# EAGLE board stmdc (EAGLE 7.2.0)
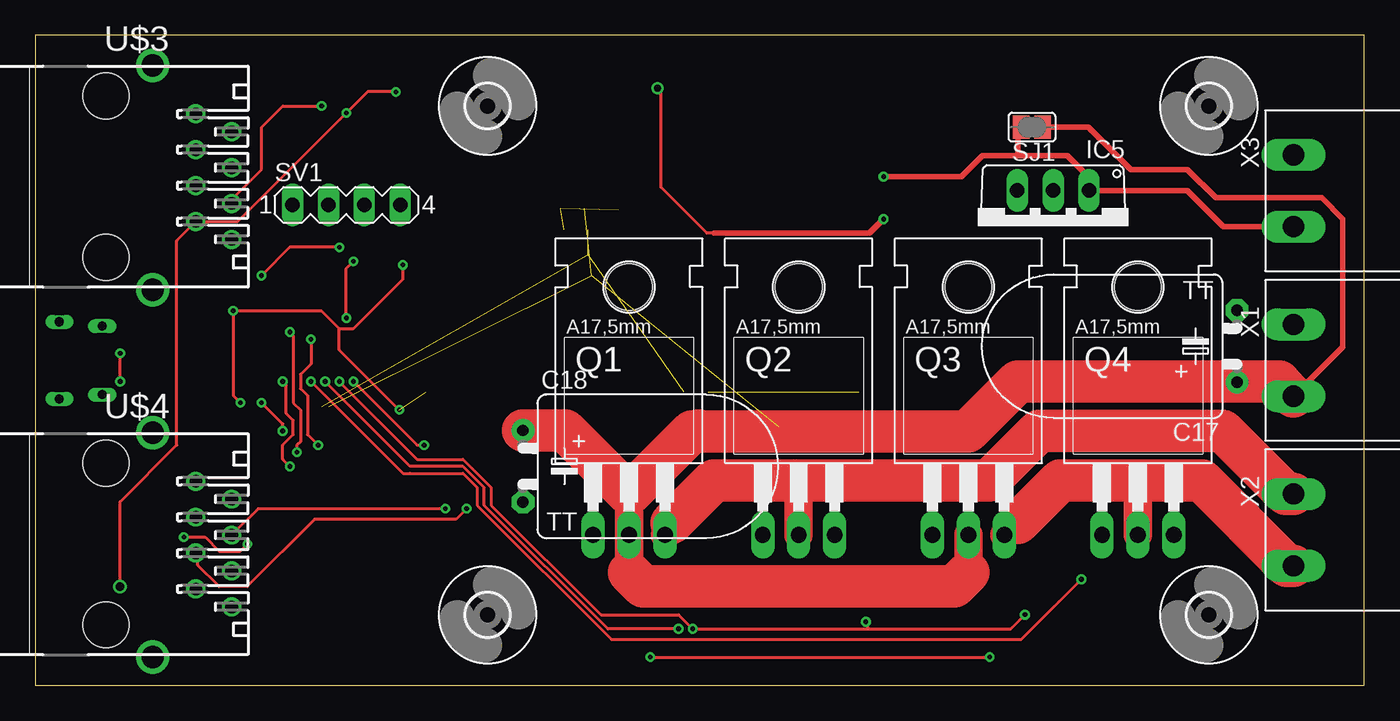
[diagram p0: board, top side]
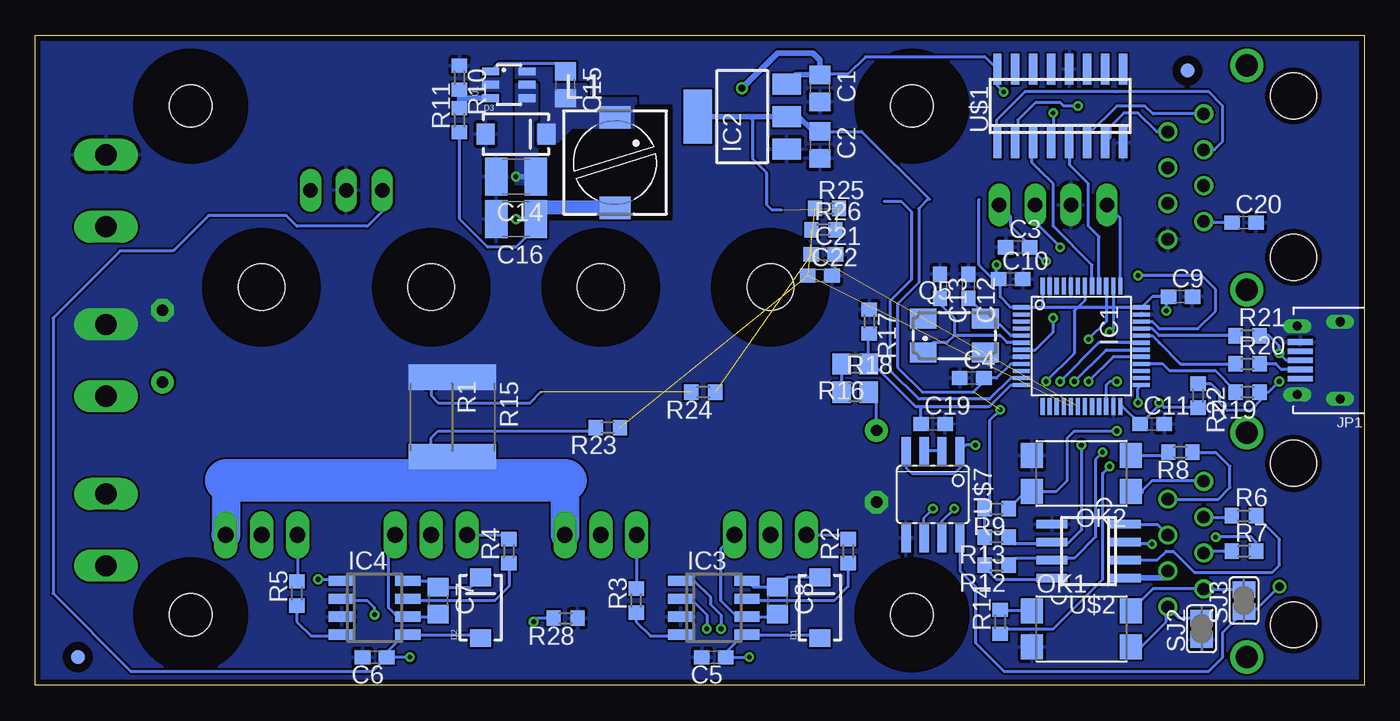
[diagram p1: board, bottom side, seen from below]

Size 94 x 46 mm. Coordinates in mm from the lower left corner, seen from the top.
Outline: 0,0 94,0 94,46 0,46 0,0
Copper layers (1*16): Top 0.0356mm / dielectric 1.5011mm / Bottom 0.0356mm
Design rules "osh *": minimum track width 6mil, minimum drill 13mil, track to track 6mil, track to pad 6mil, pad to pad 6mil, via to via 6mil, smd to smd 6mil, copper to edge 15mil, drill to drill 6mil, minimum pad ring 7mil, minimum via ring 7mil, stop-mask expansion 3mil, vias tented up to drill 0mil, thermal gap 10mil
bRestrict: area 49,33 to 58,41

## Footprints (pad centres in the part's own frame; a part is rotated, then mirrored left to right if it is on the bottom)
C0805 = smd 1.3 x 1.5: 1 -0.95,0; 2 0.95,0
C0603 = smd 1.1 x 1: 1 -0.85,0; 2 0.85,0
C1210 = smd 1.6 x 2.7: 1 -1.4,0; 2 1.4,0
TT5D11L = drill 0.813 pad 1.6: + -2.54,0 | drill 0.813 pad 1.6 octagon: - 2.54,0
SMA-DIODE = smd 1.27 x 1.47: A -2.15,0; C 2.15,0
3,0 = hole 3: 0,0
LQFP48 = smd 0.3 x 1.2: 1 -2.75,-4.25; 2 -2.25,-4.25; 3 -1.75,-4.25; 4 -1.25,-4.25; 5 -0.75,-4.25; 6 -0.25,-4.25; 7 0.25,-4.25; 8 0.75,-4.25; 9 1.25,-4.25; 10 1.75,-4.25; 11 2.25,-4.25; 12 2.75,-4.25; 25 2.75,4.25; 26 2.25,4.25; 27 1.75,4.25; 28 1.25,4.25; 29 0.75,4.25; 30 0.25,4.25; 31 -0.25,4.25; 32 -0.75,4.25; 33 -1.25,4.25; 34 -1.75,4.25; 35 -2.25,4.25; 36 -2.75,4.25 | smd 1.2 x 0.3: 13 4.25,-2.75; 14 4.25,-2.25; 15 4.25,-1.75; 16 4.25,-1.25; 17 4.25,-0.75; 18 4.25,-0.25; 19 4.25,0.25; 20 4.25,0.75; 21 4.25,1.25; 22 4.25,1.75; 23 4.25,2.25; 24 4.25,2.75; 37 -4.25,2.75; 38 -4.25,2.25; 39 -4.25,1.75; 40 -4.25,1.25; 41 -4.25,0.75; 42 -4.25,0.25; 43 -4.25,-0.25; 44 -4.25,-0.75; 45 -4.25,-1.25; 46 -4.25,-1.75; 47 -4.25,-2.25; 48 -4.25,-2.75
SOT223 = smd 1.5 x 2: 1 -2.3,-3.15; 2 0,-3.15; 3 2.3,-3.15 | smd 3.8 x 2: 4 0,3.15
SO08 = smd 0.72 x 1.78: 1 -1.905,-2.35; 2 -0.635,-2.35; 3 0.635,-2.35; 4 1.905,-2.35; 5 1.905,2.35; 6 0.635,2.35; 7 -0.635,2.35; 8 -1.905,2.35
TO220V = drill 1.016 long: 1 -2.54,-2.54; 2 0,-2.54; 3 2.54,-2.54
FCI-10103594-0001LF = smd 0.4 x 1.75: 1 -1.3,4.525; 2 -0.65,4.525; 3 0,4.525; 4 0.65,4.525; 5 1.3,4.525 | drill 0.65 pad 1 long: 6 2.425,4.73; 7 2.725,1.7; 8 -2.725,1.7; 9 -2.425,4.73
PIS2816 = smd 2.2 x 1.6: 1 0,3.2; 2 0,-3.2
SMD4 = smd 1.78 x 1.55: 1 -1.27,-3.5; 2 1.27,-3.5; 3 1.27,3.5; 4 -1.27,3.5
TO220BH = drill 1.118 long: D 0,-6.35; G -2.54,-6.35; S 2.54,-6.35 | hole 3.302: 0,11.176
CTS406 = smd 1.9 x 1.4: 1 -2.2,-1.2; 2 2.2,-1.2; 3 2.2,1.2; 4 -2.2,1.2
R2512 = smd 1.8 x 3.2: 1 -2.8,0; 2 2.8,0 | smd 1.27 x 0.635: P$1 -2.54,0; P$2 2.54,0
R0603 = smd 1 x 1.1: 1 -0.85,0; 2 0.85,0
R2512' = smd 1.8 x 3.2: 1 -2.8,0; 2 2.8,0
R0805 = smd 1.3 x 1.5: 1 -0.95,0; 2 0.95,0
SJ = smd 1.168 x 1.6: 1 -0.762,0; 2 0.762,0
MA04-1 = drill 1.016 long: 1 -3.81,0; 2 -1.27,0; 3 1.27,0; 4 3.81,0
SOT23-6 = smd 0.55 x 1.2: 1 0.95,1.3; 2 0,1.3; 3 -0.95,1.3; 4 -0.95,-1.3; 5 0,-1.3; 6 0.95,-1.3
SO16 = smd 0.6 x 2.2: 1 -4.445,-2.6; 2 -3.175,-2.6; 3 -1.905,-2.6; 4 -0.635,-2.6; 5 0.635,-2.6; 6 1.905,-2.6; 7 3.175,-2.6; 8 4.445,-2.6; 9 4.445,2.6; 10 3.175,2.6; 11 1.905,2.6; 12 0.635,2.6; 13 -0.635,2.6; 14 -1.905,2.6; 15 -3.175,2.6; 16 -4.445,2.6
SO08' = smd 0.6 x 2.2: 1 -1.905,-2.6; 2 -0.635,-2.6; 3 0.635,-2.6; 4 1.905,-2.6; 5 1.905,2.6; 6 0.635,2.6; 7 -0.635,2.6; 8 -1.905,2.6
RJ45 = drill 0.889: 1 -4.445,6.35; 2 -3.175,8.89; 3 -1.905,6.35; 4 -0.635,8.89; 5 0.635,6.35; 6 1.905,8.89; 7 3.175,6.35; 8 4.445,8.89 | drill 1.575 pad 2.184: G3 -7.874,3.302; G4 8.001,3.302 | hole 3.251: -5.715,0; 5.715,0
FIDUCIAL_1MM = smd 1 x 1: 1 0,0
SOIC08 = smd 0.66 x 2.032: 1 -1.905,-3.073; 2 -0.635,-3.073; 3 0.635,-3.073; 4 1.905,-3.073; 5 1.905,3.073; 6 0.635,3.073; 7 -0.635,3.073; 8 -1.905,3.073
AKL230-02 = drill 1.5 long: 1 -2.54,0; 2 2.54,0

## Placement (x,y rotation side)
C1  [C0805]  38.5,42.25 270 bottom
C2  [C0805]  38.5,38.25 270 bottom
C3  [C0603]  24.5,31 0 bottom
C4  [C0603]  27.75,21.75 0 bottom
C5  [C0603]  46,2 180 bottom
C6  [C0603]  70,2 180 bottom
C7  [C0805]  65.5,6 270 bottom
C8  [C0805]  41.5,6 270 bottom
C9  [C0603]  13,27.5 0 bottom
C10  [C0603]  25,28.75 0 bottom
C11  [C0603]  15,18.5 0 bottom
C12  [C0603]  28,28.25 270 bottom
C13  [C0603]  30,28.25 270 bottom
C14  [C1210]  60,36 180 bottom
C15  [C0805]  56.5,42.5 270 bottom
C16  [C1210]  60,33 180 bottom
C17  [TT5D11L]  85,24 90 top
C18  [TT5D11L]  34.5,15.5 270 top
C19  [C0603]  30.5,18.5 0 bottom
C20  [C0603]  8.5,32.75 0 bottom
C21  1n  [C0603]  38.25,30.5 0 bottom
C22  1n  [C0603]  38.5,29 0 bottom
D1  [SMA-DIODE]  38.5,5.5 90 bottom
D2  [SMA-DIODE]  62.5,5.5 90 bottom
D3  [SMA-DIODE]  60,39 0 bottom
H1  MOUNT-HOLE3.0  [3,0]  83,5 0 top
H2  MOUNT-HOLE3.0  [3,0]  83,41 0 top
H3  MOUNT-HOLE3.0  [3,0]  32,41 0 top
H4  MOUNT-HOLE3.0  [3,0]  32,5 0 top
IC1  STM32F303CBT  [LQFP48]  20,24 270 bottom
IC2  LD117AS33TR  [SOT223]  44,40.25 90 bottom
IC3  IR2184S  [SO08]  46,5.5 270 bottom
IC4  IR2184S  [SO08]  70,5.5 270 bottom
IC5  7815TV  [TO220V]  72,32.5 180 top
JP1  USB-RECEPTABLE  [FCI-10103594-0001LF]  0,23 90 bottom
L1  [PIS2816]  53,37 0 bottom
OK1  LTV816S  [SMD4]  20,4 270 bottom
OK2  LTV816S  [SMD4]  20,15 90 bottom
Q1  [TO220BH]  42,17 0 top
Q2  [TO220BH]  54,17 0 top
Q3  [TO220BH]  66,17 0 top
Q4  [TO220BH]  78,17 0 top
Q5  [CTS406]  29,24.75 0 bottom
R1  0.01  [R2512]  66,19 270 bottom
R2  [R0603]  36.5,9.5 90 bottom
R3  [R0603]  51.5,6 90 bottom
R4  [R0603]  60.5,9.5 90 bottom
R5  [R0603]  75.5,6.5 90 bottom
R6  [R0603]  8.5,12 0 bottom
R7  [R0603]  8.5,9.5 0 bottom
R8  [R0603]  13,16.5 180 bottom
R9  [R0603]  26,12.5 180 bottom
R10  [R0603]  64,43 270 bottom
R11  [R0603]  64,40 90 bottom
R12  [R0603]  26,8.5 180 bottom
R13  [R0603]  26,10.5 180 bottom
R14  [R0603]  25.75,4.5 90 bottom
R15  0.01  [R2512']  63,19 270 bottom
R16  [R0805]  36,22.75 180 bottom
R17  [R0603]  35,25.75 270 bottom
R18  [R0805]  36,20.75 0 bottom
R19  [R0603]  8.25,20.75 180 bottom
R20  [R0603]  8.25,22.75 0 bottom
R21  [R0603]  8.25,24.75 0 bottom
R22  [R0603]  11.75,20.5 270 bottom
R23  1k  [R0603]  53.5,18.25 180 bottom
R24  1k  [R0603]  46.75,20.75 180 bottom
R25  15k  [R0603]  38,33.75 0 bottom
R26  15k  [R0603]  38.25,32.25 0 bottom
R28  [R0603]  56.5,4.75 180 bottom
SJ1  [SJ]  70.5,39.5 180 top
SJ2  [SJ]  11.5,4 90 bottom
SJ3  [SJ]  8.5,6 90 bottom
SV1  [MA04-1]  22,34 0 top
U1  LMR14206  [SOT23-6]  60.5,42.5 90 bottom
U$1  AM26LS32ACD  [SO16]  21.5,41 0 bottom
U$2  HCPL-053L-SMD  [SO08']  19.5,9.5 90 bottom
U$3  RJ45S  [RJ45]  5,36 270 top
U$4  RJ45S  [RJ45]  5,10 270 top
U$5  FIDUCIAL  [FIDUCIAL_1MM]  91,2 0 bottom
U$6  FIDUCIAL  [FIDUCIAL_1MM]  12.5,43.5 0 bottom
U$7  ADM485SOIC8  [SOIC08]  30.5,13.5 180 bottom
X1  [AKL230-02]  89,23 270 top
X2  [AKL230-02]  89,11 270 top
X3  [AKL230-02]  89,35 270 top

## Library data of the parts
C1-C22 L1 R2-R26 R28 = rcl
D1-D3 = SparkFun-DiscreteSemi
H1-H4 = holes
IC1 = micro-stm_v2
IC2 = v-reg
IC3 IC4 = IR2184; MF: INTERNATIONAL RECTIFIER(IR); MPN: IR2184
IC5 = linear
JP1 R1 U1 U$1-U$4 U$7 = reroolib
OK1 OK2 = optocoupler; OC_FARNELL: unknown; OC_NEWARK: unknown
Q1-Q4 = transistor-power
Q5 = crystal; OC_FARNELL: unknown; OC_NEWARK: unknown
SJ1-SJ3 = jumper
SV1 = con-lstb; OC_FARNELL: unknown; OC_NEWARK: unknown
U$5 U$6 = adafruit
X1-X3 = reroolib; OC_FARNELL: unknown; OC_NEWARK: unknown

## Nets
3V3: C2.1 C4.2 C9.1 C10.1 C11.1 IC1.1 IC1.9 IC1.24 IC1.36 IC1.48 IC2.4 R9.2 R12.2 R13.2 R22.2 R25.2 R26.2 U$2.8
5V: C1.1 C16.1 C20.1 IC2.3 L1.2 R11.1 SJ3.1 U$1.4 U$1.16 U$3.7 U$7.8
24V: C14.1 IC5.1 SJ1.2 U1.4 U1.5 X3.2
A+: U$1.6 U$3.1
A-: U$1.7 U$3.2
B+: U$1.2 U$3.6
B-: U$1.1 U$3.3
CUR: IC1.11
DC_SENSE: C19.1 IC1.12 R16.1 R17.2
DIR+: U$2.4 U$4.4 U$7.7
DIR-: R7.1 U$4.5 U$7.6
EN+: OK2.1 U$4.1
EN-: R8.1 U$4.2
ERR+: OK1.4 SJ3.2 U$4.7
ERR-: OK1.3 SJ2.2 U$4.8
GND: C1.2 C2.2 C3.1 C4.1 C5.2 C6.2 C9.2 C10.2 C11.2 C12.1 C13.1 C14.2 C16.2 C17.- C18.- C19.2 C20.2 C21.2 C22.2 D3.A IC1.8 IC1.23 IC1.35 IC1.44 IC1.47 IC2.1 IC3.3 IC4.3 IC5.2 JP1.5 JP1.6 JP1.7 JP1.8 JP1.9 OK1.2 OK2.3 R1.1 R10.1 R15.1 R17.1 R28.1 SJ2.1 SV1.2 U1.2 U$1.8 U$1.12 U$2.5 U$3.8 U$7.5 X1.1 X3.1
LIN: C15.2 D3.C L1.1 U1.6
N$1: C8.1 D1.C IC3.8
N$2: C8.2 IC3.6 Q1.S Q2.D X2.1
N$3: C5.1 C6.1 D1.A D2.A IC3.5 IC4.5 IC5.3
N$4: Q2.G R3.2
N$5: Q1.G R2.2
N$6: IC3.4 R3.1
N$7: IC3.7 R2.1
N$8: C7.2 IC4.6 Q3.S Q4.D X2.2
N$9: C7.1 D2.C IC4.8
N$10: IC4.7 R4.1
N$11: IC4.4 R5.1
N$12: Q3.G R4.2
N$13: C12.2 IC1.5 Q5.3
N$14: Q4.G R5.2
N$15: R16.2 R18.1
N$16: C17.+ C18.+ Q1.D Q3.D R18.2 SJ1.1 X1.2
N$17: U$7.2 U$7.3
N$18: C13.2 IC1.6 Q5.1
N$19: R6.2 U$2.2
N$20: R1.P$2 R23.2
N$21: R7.2 U$2.3
N$22: OK2.2 R8.2
N$23: C15.1 U1.1
N$24: R1.P$1 R24.2
N$27: R10.2 R11.2 U1.3
N$28: OK1.1 R14.2
N$29: JP1.3 R19.1 R21.2 R22.1
N$30: JP1.2 R20.2
N$33: IC1.19
N$37: IC1.16
N$38: IC1.15
N$39: IC1.14
N$40: IC1.13
N$43: IC1.10
NRST: C3.2 IC1.7 SV1.4
S+: C22.1 IC1.17 R23.1 R25.1
S-: C21.1 IC1.18 R24.1 R26.1
SCL: IC1.45
SDA: IC1.46
SHUNT: Q2.S Q4.S R1.2 R15.2
STATUS: IC1.22 R14.1
STEP+: U$2.1 U$4.6
STEP-: R6.1 U$4.3
SWCLK: IC1.37 SV1.1
SWDIO: IC1.34 SV1.3
TIM1_BKIN: IC1.25 OK2.4 R9.1
TIM1_CH1: IC1.29 IC4.1
TIM1_CH2: IC1.30 IC3.1
TIM1_CH3: IC1.31 IC3.2 IC4.2 R28.2
TIM2_CH1: IC1.38 R12.1 U$2.7
TIM2_CH2: IC1.39 R13.1 U$2.6
TIM3_CH1: IC1.40 U$1.5
TIM3_CH2: IC1.41 U$1.3
USART1_RX: IC1.43
USART1_TX: IC1.42 U$7.1 U$7.4
USB_DM: IC1.32 R20.1
USB_DP: IC1.33 R21.1
USB_EN: IC1.28 R19.2

## Tracks (layer width: path | path; a pad name or v marks a point on that pad's centre or on a via)
3V3  (via drill 0.33)  (3 unrouted)
  Top 0.2: v14.5,20 14,20.5 v14,26.5 20.25,26.5 21.5,25.25 | 21.5,25.25 22.5,25.25 26,28.75 v26,29.75 | v25.75,19.5 21.5,23.75 21.5,25.25
  Bottom 0.2: 22.75,26.75 IC1.36 15,27.5 C9.1 14,26.85 v14,26.5 | 22.75,26.75 IC1.1 25,26.75 25.75,27.5 25.75,28.65 C10.1 | 16.25,18.5 C11.1 | U$2.8 22.2,7.5 26,7.5 26.85,8.35 R12.2 R13.2 R9.2 26.5,12.85 26.5,18.75 v25.75,19.5 | 27.25,34.41 27.25,29.75 26,28.5 v26,29.75 | C11.1 14.5,19.85 v14.5,20 14.15,19.65 R22.2 | IC1.9 25,22.75 26,21.75 C4.2 26.9,21.5 27.65,20.75 31.25,20.75 33,22.5 33,27 31.5,28.5 31.5,33.75 30.84,34.41 30.75,34.41 35.55,39.2 C2.1 | 41.25,33.65 41.9,33.65 42.25,34 42.25,36.25 43.25,37.25 43.25,40 43.5,40.25 | IC1.24 17.1,19.75 C11.1 | IC1.48 22.75,26.75
  Bottom 0.4: IC2.4 43.5,40.25 40,40.25 39,39.25 38.55,39.25 C2.1
5V  (via drill 0.33, 0.5, 0.6)
  Top 0.2: v6,7 6,13 10,17 10,31.48 U$3.7 14.32,32.83 v22,40.5 23.5,42 v25.5,42 | 48,32 47.5,32 44.25,35.25 44.25,42 v44,42.25
  Top 0.4: 48,32 59,32 v60,33
  Bottom 0.2: 59.05,33.45 59,32 60,31 62,31 64,33 R11.1 | v6,7 7.76,5.24 SJ3.1 10,3.74 10,2 11,1 25.5,1 27.5,3 27.5,7 28.59,8.1 U$7.8 | v25.5,42 25.95,42.45 U$1.16 26.84,44.5 35.25,44.5 36.5,43.25 38.45,43.25 C1.1 | v22,40.5 22,38.53 U$1.4 | C20.1 11.28,32.75 U$3.7
  Bottom 0.4: 41.15,42.25 IC2.3 40.2,43.2 C1.1 38.5,44.25 39,44.75 41.5,44.75 v44,42.25 | v60,33 C16.1
  Bottom 0.406: 58.85,33.8 C16.1 59.05,33.45
  Bottom 0.5: 58.2,33.8 58.5,33.5 58.5,33.1 C16.1
  Bottom 1: L1.2 58.2,33.8
24V  (via drill 0.33)
  Top 0.4: X3.2 84.04,32.46 81.5,35 74.58,35 IC5.1 74.54,35.96 73,37.5 69.5,37.5 67,37.5 65.5,36 v60,36
  Top 0.406: SJ1.2 69.5,39.5 69.5,37.5
  Bottom 0.4: v60,36 C14.1
  pour Bottom (isolate 0.254, no thermals): 58.5,42.5 60,42.5 60,35.5 58.5,35.5
A+
  Bottom 0.2: U$3.1 14.95,40.45 15.5,41 17.5,41 19.5,39 19.5,38.49 U$1.6
A-
  Bottom 0.2: U$3.2 14.68,39.17 16,40.5 17,40.5 18,39.5 18,38.73 U$1.7
B+  (via drill 0.33)
  Top 0.2: U$3.6 13.89,34.39 16,36.5 16,39.5 17.5,41 v20.25,41
  Bottom 0.2: v20.25,41 21.25,41 21.5,41.25 23.25,41.25 24.5,40 24.5,38.58 U$1.2
B-
  Bottom 0.2: U$3.3 10.6,37.91 10,38.5 10,41 11,42 17.5,42 24,42 26,40 26,38.45 | 26,38.45 U$1.1 26,38.45
CUR
  Bottom 0.2: 33.95,34.25 32.75,34.25 32,33.5 32,28.75 33.5,27.25 33.5,22.25 31.5,20.25 26.5,20.25 25,21.75 IC1.11
DC_SENSE
  Bottom 0.2: R17.2 35.05,24.65 R16.1 34.75,22.75 31.75,19.75 31.5,19.75 | 31.5,19.75 26.5,19.75 25,21.25 IC1.12 | C19.1 31.35,19.6 31.5,19.75
DIR+  (via drill 0.33)
  Top 0.2: v29,12.5 15.76,12.5 U$4.4
  Bottom 0.2: U$2.4 14.64,11.4 14.64,11.38 U$4.4 | U$7.7 29.86,11.63 v29,12.5
DIR-  (via drill 0.33)
  Top 0.2: v30.5,12.5 29.75,11.75 19.75,11.75 15,7 13,7 11.5,8.5 11.5,9.21 U$4.5
  Bottom 0.2: R7.1 11.21,9.5 U$4.5 | U$7.6 31.14,11.87 v30.5,12.5
EN+
  Bottom 0.2: 15.77,13.73 15,14.5 11.4,14.5 U$4.1
  Bottom 0.406: OK2.1 15.77,13.73
EN-
  Bottom 0.2: R8.1 10.5,16.5 9.5,15.5 9.5,14 10.32,13.18 U$4.2
ERR+
  Bottom 0.2: OK1.4 14.95,6.83 U$4.7 11.29,6.76 SJ3.2
ERR-
  Bottom 0.2: OK1.3 15.77,2.73 14,4.5 14,5.45 U$4.8 13.1,4.76 SJ2.2
GND
  pour Bottom (rank 6): 0,0 94,0 94,46 0,46
  pour Bottom (no thermals): 60.5,23.5 60.5,20.5 68.5,20.5 68.5,23.5
  pour Bottom (no thermals): 60.5,23.5 60.5,20.5 68.5,20.5 68.5,23.5
  pour Bottom (no thermals): 84,28 92,28 92,23.5 83.5,23.5 83.5,28
  pour Bottom (no thermals): 33.5,14 35.5,14 35.5,12 33.5,12
  pour Bottom (no thermals): 60.5,44.5 63,44.5 63,41 60.5,41
LIN
  Bottom 1: 57.85,39.1 D3.C
  pour Bottom (rank 2, no thermals): 51.5,39.5 51.5,41.5 55,41.5 55,42.5 57.5,42.5 57.5,44 60,44 60,42 58.5,42 58.5,38.5 57,38.5 56,39.5
N$1
  Bottom 0.2: D1.C 40.8,7.65 C8.1 43.2,6.95 IC3.8
N$2
  Top 2: 45,11.5 45,11.11 Q1.S | Q2.D 54,14 | 54,14 53.5,14.5 | 54,14 54,14.5
  Top 3: X2.1 88.46,13.54 84,18 71,18 67.5,14.5 54,14.5 | 53.5,14.5 48,14.5 45,11.5
  Bottom 0.2: C8.2 41.69,4.87 IC3.6 44.37,4.87 45.5,6 45.5,9.69 Q1.S
N$3  (via drill 0.33)
  Top 0.2: v43.5,2 v67.5,2
  Bottom 0.2: C6.1 69,2 69,2.5 67.91,3.6 IC4.5 62.74,3.6 D2.A | v43.5,2 C5.1 45,2.15 45,2.5 43.91,3.6 IC3.5 38.74,3.6 D1.A | v67.5,2 C6.1 | IC5.3 69.46,33.54 70.5,32.5 75.5,32.5 76.25,33.25 81.75,33.25 84.25,30.75 88,30.75 92.75,26 92.75,6.5 87.25,1 70.15,1 C6.1
N$4
  Bottom 0.2: Q2.G 51.46,6.89 R3.2
N$5
  Bottom 0.2: Q1.G 36.8,10.65 R2.2
N$6
  Bottom 0.2: R3.1 51.5,4.5 50.5,3.5 48.45,3.5 IC3.4
N$7
  Bottom 0.2: R2.1 36.5,7 37.5,6 43.52,6 IC3.7
N$8
  Top 2: 69.5,11.5 69.39,11.5 Q3.S | Q4.D 78,14.5
  Top 3: X2.2 88.54,8.46 82.5,14.5 78,14.5 72.5,14.5 69.5,11.5
  Bottom 0.2: C7.2 65.69,4.87 IC4.6 68.36,4.87 69,5.5 69,10.19 Q3.S
N$9
  Bottom 0.2: IC4.8 65.95,7.41 C7.1 63.2,6.95 D2.C
N$10
  Bottom 0.2: R4.1 60.5,7 61.5,6 67.52,6 IC4.7
N$11
  Bottom 0.2: R5.1 75.5,4.5 74.5,3.5 72.44,3.5 IC4.4
N$12
  Bottom 0.2: Q3.G 60.8,10.65 R4.2
N$13
  Bottom 0.2: C12.2 26.55,25.95 Q5.3 26.35,25.5 25.75,25.5 25,24.75 IC1.5
N$14
  Bottom 0.2: Q4.G 75.46,7.39 R5.2
N$15
  Bottom 0.2: R18.1 R16.2
N$16
  Top 0.2: C17.+ 88,21.46
  Top 0.406: SJ1.1 74.5,39.5 77.5,36.5 81.5,36.5 83.5,34.5 91,34.5 92.5,33 92.5,23.96 X1.2
  Top 2: 42,13.5 Q1.D 42,8 | 66,8 Q3.D
  Top 3: X1.2 88,21.46 88,21.5 69.5,21.5 65.96,17.96 47,17.96 | 47,17.96 46.46,17.96 42,13.5 37.46,18.04 C18.+ | 42,8 43,7 65,7 66,8 | 46.92,18.04 47,17.96
  Bottom 0.2: C18.+ 34.5,20.7 R18.2
N$17
  Bottom 0.2: U$7.2 U$7.3
N$18
  Bottom 0.2: Q5.1 30.5,24.25 29.5,24.25 29,24.75 | C13.2 30,27 29,26 29,24.75 | IC1.6 25.25,24.25 25.75,24.75 29,24.75
N$19
  Bottom 0.2: U$2.2 14.63,8.87 14,9.5 13.5,9.5 12,8 6.5,8 6,8.5 6,10.35 R6.2
N$20
  Bottom 0.2: R1.P$2 66,17.5 65.5,18 59,18 54.35,18 R23.2
N$21  (via drill 0.33)
  Top 0.2: v10.5,10.5 12,10.5 13,9.5 14.5,9.5 v15,10
  Bottom 0.2: R7.2 7.65,10.15 8,10.5 v10.5,10.5 | v15,10 16.77,10 U$2.3
N$22
  Bottom 0.2: OK2.2 14.08,16.27
  Bottom 0.406: 14.08,16.27 R8.2
N$23
  Bottom 0.2: C15.1 56.45,43.45 57,44 61.25,44 U1.1
N$24  (1 unrouted)
  Bottom 0.2: R1.P$1 66,20.5 65.5,20 59,20 58.25,20.75
N$27
  Bottom 0.406: U1.3 63.8,41.55 R11.2 R10.2
N$28
  Bottom 0.2: OK1.1 25.67,5.27 R14.2
N$29  (via drill 0.33)
  Top 0.2: v6,21.5 v6,23.5
  Bottom 0.2: JP1.3 5.5,23 v6,23.5 6,24 6.75,24.75 R21.2 | R22.1 10.85,21.35 10.25,20.75 10.25,20 9.75,19.5 8,19.5 7.25,20.25 7.25,20.6 R19.1 6.75,20.75 v6,21.5
N$30
  Bottom 0.2: JP1.2 5.85,22.35 6.25,22.75 R20.2
NRST  (via drill 0.33)
  Top 0.2: v22,26 22,29.5 v22.5,30
  Bottom 0.2: IC1.7 23.25,23.75 22,25 v22,26 | v22.5,30 22.65,30 C3.2 23.65,31.15 25,32.5 25,33.19 SV1.4
S+  (3 unrouted)
S-  (3 unrouted)
SHUNT
  Bottom 0.2: R15.2 60.5,14.5
  Bottom 0.4: 67,16 R1.2 67,16 | 67,16 67,14.5 67,16
  Bottom 2: Q2.S 56.54,13.9 arc45 56.5,14.5 | 80.5,14.5 80.5,10.65 Q4.S
  Bottom 3: 56.5,14.5 60.5,14.5 67,14.5 80.5,14.5
STATUS  (via drill 0.33)
  Top 0.2: v18,15.5 17.5,16 17.5,17 18.25,17.75 18.25,18.75 17.75,19.25 17.75,21.25 v17.5,21.5
  Bottom 0.2: R14.1 25.6,3.85 25.5,4 22,4 18.5,7.5 18.5,15 v18,15.5 | v17.5,21.5 18,21.5 18.25,21.25 IC1.22
STEP+
  Bottom 0.406: U$2.1 13.89,7.59 U$4.6
STEP-
  Bottom 0.2: U$4.3 9.45,11.9 R6.1
SWCLK
  Bottom 0.2: IC1.37 17.25,33.06 SV1.1
SWDIO  (via drill 0.33)
  Top 0.2: v21.5,31 18,31 v16,29
  Bottom 0.2: SV1.3 23.27,32.77 v21.5,31 | IC1.34 15,25.75 14.5,25.25 11.75,25.25 10.5,26.5 10.5,28 11.5,29 v16,29
TIM1_BKIN  (via drill 0.33)
  Top 0.2: v17.5,18 17.5,18.5 v16,20
  Bottom 0.2: R9.1 23.92,13.73 OK2.4 21.77,13.73 21,14.5 21,17.5 20.5,18 v17.5,18 | v16,20 16,21 IC1.25
TIM1_CH1  (via drill 0.33)
  Top 0.2: v19.5,21.5 26,15 26.5,15 30.25,15 31.25,14 31.25,12.75 40.75,3.25 69.75,3.25 v74,7.5
  Bottom 0.2: IC1.29 17.75,23.25 v19.5,21.5 | v74,7.5 72.44,7.5 IC4.1
TIM1_CH2  (via drill 0.33)
  Top 0.2: v45.5,4 40.5,4 31.75,12.75 31.75,14 30.25,15.5 26.5,15.5 v20.5,21.5
  Bottom 0.2: IC3.1 47.41,7.41 46.25,6.25 46.25,5.75 45.5,5 v45.5,4 | v20.5,21.5 18.25,23.75 IC1.30
TIM1_CH3  (via drill 0.33)
  Top 0.2: 59,4 v46.5,4 45.5,5 40,5 32.25,12.75 32.25,14 30.25,16 27,16 v21.5,21.5 | 59,4 69,4 v70,5 | v58.75,4.5 58.75,4.25 59,4
  Bottom 0.2: IC3.2 47.63,6.13 46.5,5 v46.5,4 | v70,5 70,5.5 70.5,6 72.22,6 IC4.2 | IC1.31 18.75,24.25 v21.5,21.5 | R28.2 58.5,4.75 v58.75,4.5
TIM2_CH1  (via drill 0.33)
  Top 0.2: v18,25 18.25,24.75 18.25,20 18.75,19.5 18.75,17.25 18.5,17 v18.5,16.5
  Bottom 0.2: IC1.38 17.75,25.25 v18,25 | v18.5,16.5 19,16 19,10.5 20.5,9 22.23,9 | 22.23,9 U$2.7 | 22.23,9 24.65,9 R12.1
TIM2_CH2  (via drill 0.33)
  Top 0.2: v20,17 19.25,17.75 19.25,20.5 18.75,21 18.75,22 19.5,22.75 v19.5,24.5
  Bottom 0.2: IC1.39 18.25,25.75 v19.5,24.5 | v20,17 20,11 21,10 22.23,10 | 22.23,10 U$2.6 | 22.23,10 24.65,10 R13.1
TIM3_CH1
  Bottom 0.2: U$1.5 20.86,36.87 19.75,35.75 | 19.75,35.75 19.5,35.5 | IC1.40 18.75,31.75 19.5,32.5 19.5,35.5 | 19.5,35.5 19.75,35.75
TIM3_CH2
  Bottom 0.2: IC1.41 19.25,29.75 22,32.5 22,35.5 23,36.5 23.5,37 23.5,38.3 U$1.3
USART1_TX  (via drill 0.33)
  Top 0.2: v22.5,21.5 27,17 v27.5,17
  Bottom 0.2: U$7.4 32.41,15.4 32,15 29,15 28.5,15.5 28.5,16.48 U$7.1 28.17,17 v27.5,17 | IC1.42 19.75,27.25 20.5,26.5 20.5,23.5 v22.5,21.5
USB_DM
  Bottom 0.2: IC1.32 15,24.75 14.5,24.25 13,22.75 R20.1
USB_DP
  Bottom 0.2: R21.1 14.5,24.75 15,25.25 IC1.33
USB_EN
  Bottom 0.2: R19.2 9.1,20.85 10.5,22.25 13.75,22.25 14.25,22.75 IC1.28